# EAGLE board touch_pot_test (EAGLE 5.11)
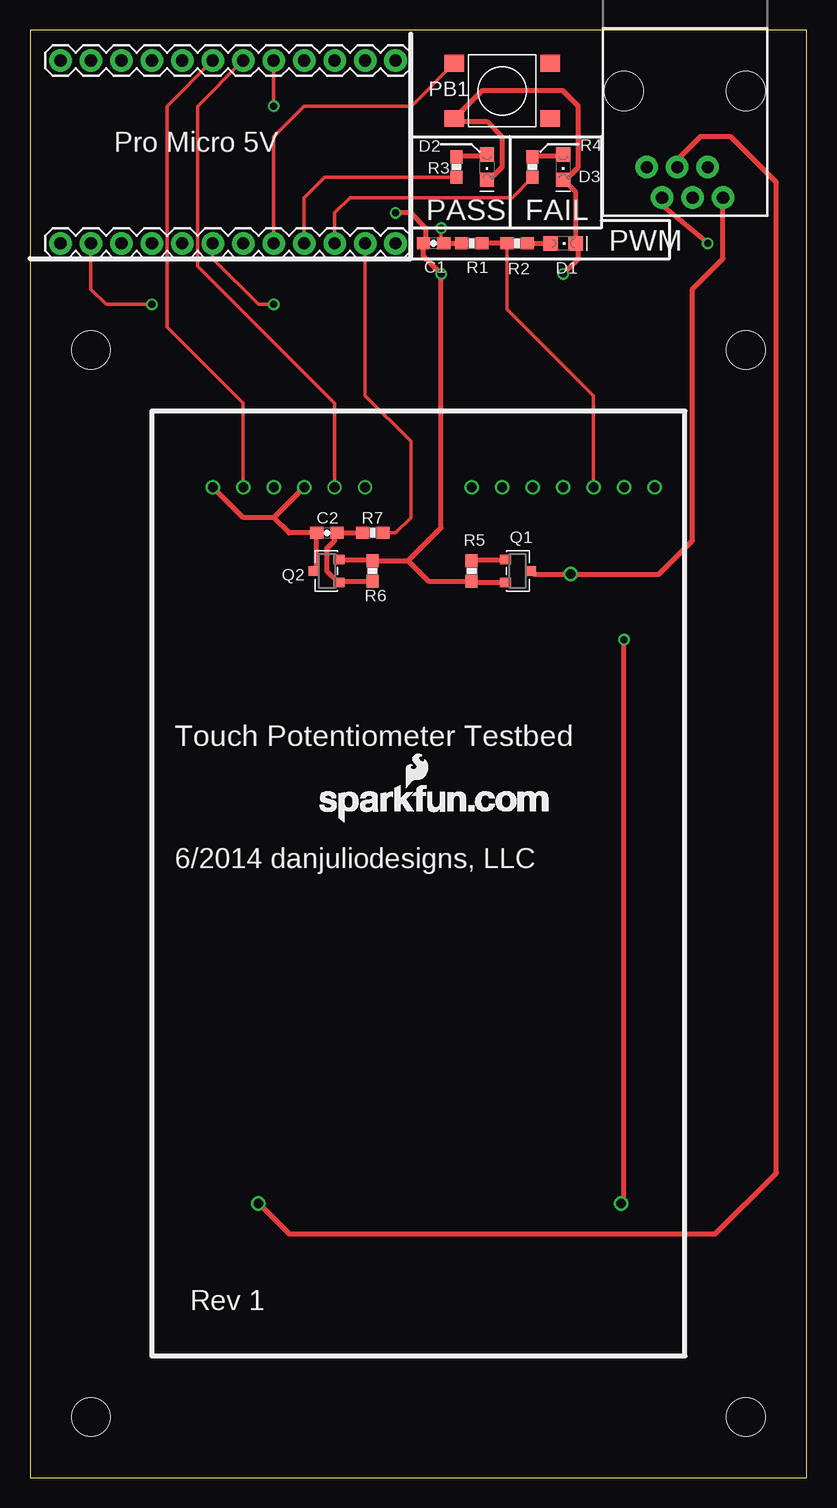
[diagram p0: board, top side]
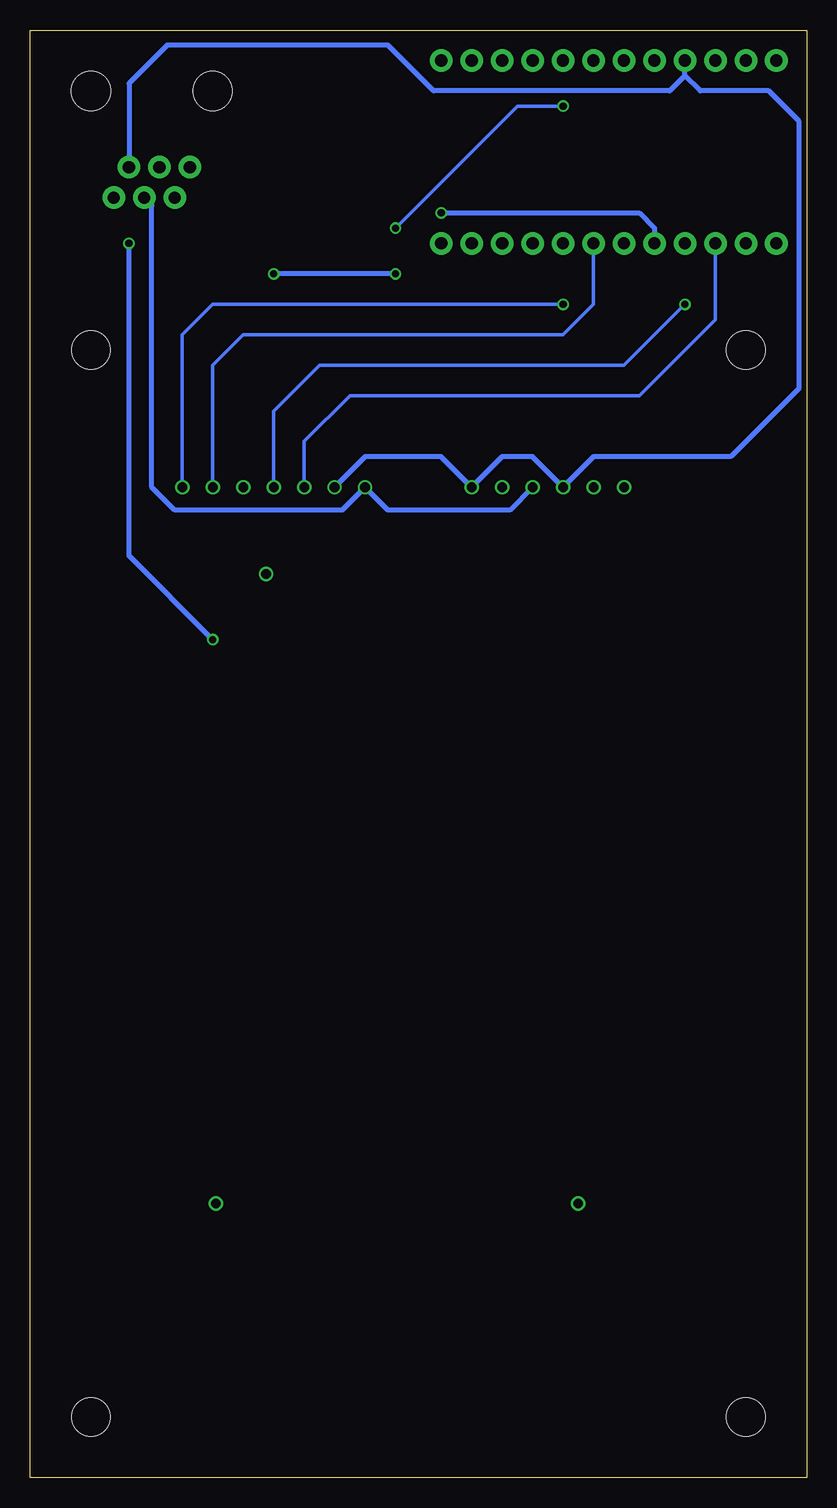
[diagram p1: board, bottom side, seen from below]

Size 64.77 x 120.65 mm. Coordinates in mm from the lower left corner, seen from the top.
Outline: 0,0 64.77,0 64.77,120.65 0,120.65 0,0
Copper layers (1*16): Top 0.0356mm / dielectric 1.5011mm / Bottom 0.0356mm
Design rules "LaenPCBOrder": minimum track width 6mil, minimum drill 13mil, track to track 6mil, track to pad 6mil, pad to pad 6mil, via to via 6mil, smd to smd 6mil, copper to edge 15mil, drill to drill 6mil, minimum pad ring 7mil, minimum via ring 7mil, stop-mask expansion 4mil, vias tented up to drill 0mil, thermal gap 10mil
Holes 3.2 mm at 5.08,5.08 59.69,5.08 5.08,93.98 59.69,93.98

## Footprints (pad centres in the part's own frame; a part is rotated, then mirrored left to right if it is on the bottom)
C0603 = smd 1.1 x 1: 1 -0.85,0; 2 0.85,0
MM0914_HOLE_PAD = drill 0.8 round: P$1 0,0
LED_0805 = smd 1.2 x 1.2: A 0,-1.05; C 0,1.05
RJ11-6 = drill 1.016 pad 1.88 round: 1 1.905,8.89; 2 3.175,6.35; 3 4.445,8.89; 4 5.715,6.35; 5 6.985,8.89; 6 8.255,6.35 | hole 3.251: 0,0; 10.16,0
1X12 = drill 1.016 pad 1.88 round: 1 0,0; 2 2.54,0; 3 5.08,0; 4 7.62,0; 5 10.16,0; 6 12.7,0; 7 15.24,0; 8 17.78,0; 9 20.32,0; 10 22.86,0; 11 25.4,0; 12 27.94,0
CK_PTS645_SMT = smd 1.6 x 1.4: 1 -4,2.3; 2 4,2.3; 3 -4,-2.3; 4 4,-2.3
SOT23-3 = smd 0.8 x 0.9: 1 -0.95,-1; 2 0.95,-1; 3 0,1.1
R0603 = smd 1.1 x 1: 1 -0.85,0; 2 0.85,0

## Placement (x,y rotation side)
C1  0.22uF  [C0603]  33.66,102.87 180 top
C2  0.1uF  [C0603]  24.77,78.74 0 top
CON1  SINGLE_PADTESTPIN  [MM0914_HOLE_PAD]  49.28,22.86 0 top
CON2  SINGLE_PADTESTPIN  [MM0914_HOLE_PAD]  19.05,22.86 0 top
CON3  SINGLE_PADTESTPIN  [MM0914_HOLE_PAD]  45.09,75.31 0 top
CON4  SINGLE_PADTESTPIN  [MM0914_HOLE_PAD]  52.07,82.55 0 top
CON5  SINGLE_PADTESTPIN  [MM0914_HOLE_PAD]  49.53,82.55 0 top
CON6  SINGLE_PADTESTPIN  [MM0914_HOLE_PAD]  46.99,82.55 0 top
CON7  SINGLE_PADTESTPIN  [MM0914_HOLE_PAD]  41.91,82.55 0 top
CON8  SINGLE_PADTESTPIN  [MM0914_HOLE_PAD]  44.45,82.55 0 top
CON9  SINGLE_PADTESTPIN  [MM0914_HOLE_PAD]  39.37,82.55 0 top
CON10  SINGLE_PADTESTPIN  [MM0914_HOLE_PAD]  36.83,82.55 0 top
CON11  SINGLE_PADTESTPIN  [MM0914_HOLE_PAD]  27.94,82.55 0 top
CON12  SINGLE_PADTESTPIN  [MM0914_HOLE_PAD]  25.4,82.55 0 top
CON13  SINGLE_PADTESTPIN  [MM0914_HOLE_PAD]  22.86,82.55 0 top
CON14  SINGLE_PADTESTPIN  [MM0914_HOLE_PAD]  20.32,82.55 0 top
CON15  SINGLE_PADTESTPIN  [MM0914_HOLE_PAD]  17.78,82.55 0 top
CON16  SINGLE_PADTESTPIN  [MM0914_HOLE_PAD]  15.24,82.55 0 top
D1  Yellow  [LED_0805]  44.45,102.87 270 top
D2  Green  [LED_0805]  38.1,109.22 180 top
D3  Red  [LED_0805]  44.45,109.22 180 top
J1  RJ11-6PTH  [RJ11-6]  59.69,115.57 180 top
JP1  LOGO-SFENEW  [SFE-NEW-WEBLOGO]  24.13,54.61 0 top
JP2  M12PTH  [1X12]  2.54,118.11 0 top
JP3  M12PTH  [1X12]  2.54,102.87 0 top
PB1  [CK_PTS645_SMT]  39.37,115.57 0 top
Q1  N-channel  [SOT23-3]  40.64,75.56 270 top
Q2  N-channel  [SOT23-3]  24.77,75.56 90 top
R1  100 kohm  [R0603]  36.83,102.87 180 top
R2  360 ohm  [R0603]  40.64,102.87 0 top
R3  360 ohm  [R0603]  35.56,109.22 90 top
R4  360 ohm  [R0603]  41.91,109.22 90 top
R5  100 kohm  [R0603]  36.83,75.56 270 top
R6  100 kohm  [R0603]  28.57,75.56 90 top
R7  1 kohm  [R0603]  28.57,78.74 180 top

## Library data of the parts
C1 C2 CON1-CON16 D1-D3 PB1 Q1 Q2 R1-R7 = djd_eagle_library
J1 JP1-JP3 = SparkFun

## Nets
EN: JP3.11 R7.1
FAIL: JP3.10 R4.1
GND: C1.2 D1.C D2.C D3.C JP3.5 PB1.3 Q1.2 Q2.2 R5.2 R6.2
N$2: C2.2 Q2.1 R6.1 R7.2
N$3: D1.A R2.2
N$17: D2.A R3.2
N$18: D3.A R4.2
PASS: JP3.9 R3.1
PGC: CON1.P$1 J1.5
PGD: CON2.P$1 J1.4
PWM: CON6.P$1 R1.1 R2.1
PWM_DC: C1.1 JP2.8 R1.2
RST: Q1.1 R5.1
RX: CON8.P$1 JP3.2
SCL: CON5.P$1 JP3.7
SDA: CON4.P$1 JP3.6
SW_GND: C2.1 CON10.P$1 CON13.P$1 CON16.P$1 J1.3 Q2.3
TRIG: JP3.8 PB1.1
TX: CON7.P$1 JP3.3
VCC: CON9.P$1 CON11.P$1 CON14.P$1 J1.2 JP2.4
VPP: CON3.P$1 J1.1 Q1.3
W1: CON12.P$1 JP2.7
W2: CON15.P$1 JP2.6

## Tracks (layer width: path | path; a pad name or v marks a point on that pad's centre or on a via)
EN
  Top 0.305: JP3.11 27.94,90.17 31.75,86.36 31.75,80.01 30.48,78.74 R7.1
FAIL
  Top 0.305: JP3.10 25.4,105.41 26.67,106.68 40.22,106.68 R4.1
GND  (via drill 0.6)
  Top 0.406: Q2.2 28.48,76.52 R6.2 31.54,76.42 | Q1.2 36.93,74.61 R5.2 33.23,74.72 31.54,76.42 | D2.C 38.32,108.17 39.37,109.22 39.37,111.76 38.1,113.03 35.61,113.03 PB1.3 37.67,115.57 44.45,115.57 45.72,114.3 45.72,109.22 44.67,108.17 D3.C 45.5,107.12 D1.C 45.72,102.65 45.72,101.6 v44.45,100.33 | v30.48,105.41 31.75,105.41 33.02,104.14 33.02,103.08 C1.2 32.8,101.81 v34.29,100.33 34.29,79.17 31.54,76.42
  Bottom 0.406: v34.29,100.33 v44.45,100.33 | JP3.5 12.7,104.14 13.97,105.41 v30.48,105.41
N$2
  Top 0.406: R6.1 25.86,74.72 Q2.1 25.71,74.61 24.77,75.56 24.77,77.47 25.4,78.11 25.4,78.53 C2.2 R7.2
N$3
  Top 0.406: R2.2 D1.A
N$17
  Top 0.406: D2.A 38,110.17 35.66,110.17 R3.2
N$18
  Top 0.406: D3.A 44.35,110.17 42.01,110.17 R4.2
PASS
  Top 0.305: JP3.9 22.86,106.68 24.55,108.37 R3.1
PGC  (via drill 0.6)
  Top 0.406: J1.5 52.7,106.05 v56.52,102.87 | v49.53,69.85 49.53,23.11 CON1.P$1
  Bottom 0.406: v56.52,102.87 56.52,76.83 v49.53,69.85
PGD
  Top 0.406: J1.4 53.98,109.86 55.88,111.76 58.42,111.76 62.23,107.95 62.23,25.4 57.15,20.32 21.59,20.32 CON2.P$1
PWM
  Top 0.305: CON6.P$1 46.99,90.17 39.79,97.37 R2.1
  Top 0.406: R2.1 R1.1
PWM_DC  (via drill 0.6)
  Top 0.305: v20.32,114.3 JP2.8 | v34.29,104.14 34.29,103.08 C1.1
  Top 0.406: C1.1 R1.2
  Bottom 0.305: v20.32,114.3 24.13,114.3 v34.29,104.14
RST
  Top 0.406: Q1.1 36.93,76.52 R5.1
RX  (via drill 0.6)
  Top 0.305: v10.16,97.79 6.35,97.79 5.08,99.06 JP3.2
  Bottom 0.305: CON8.P$1 44.45,88.9 40.64,92.71 15.24,92.71 v10.16,97.79
SCL
  Bottom 0.305: CON5.P$1 49.53,92.71 46.99,95.25 20.32,95.25 17.78,97.79 JP3.7
SDA  (via drill 0.6)
  Top 0.305: v20.32,97.79 19.05,97.79 15.24,101.6 JP3.6
  Bottom 0.305: CON4.P$1 52.07,95.25 49.53,97.79 v20.32,97.79
SW_GND
  Top 0.406: CON16.P$1 17.78,80.01 20.32,80.01 | 20.32,80.01 CON13.P$1 | 20.32,80.01 21.59,78.74 C2.1 23.91,75.81 Q2.3
  Bottom 0.406: CON13.P$1 24.77,80.64 34.92,80.64 CON10.P$1 38.73,80.64 52.7,80.64 54.61,82.55 54.61,106.05 J1.3
TRIG
  Top 0.305: JP3.8 20.32,111.76 22.86,114.3 31.8,114.3 PB1.1
TX
  Bottom 0.305: CON7.P$1 41.91,86.36 38.1,90.17 13.97,90.17 7.62,96.52 JP3.3
VCC
  Bottom 0.406: CON9.P$1 36.83,85.09 30.48,85.09 CON11.P$1 25.4,85.09 22.86,85.09 CON14.P$1 17.78,85.09 6.35,85.09 0.64,90.81 0.64,113.03 3.17,115.57 8.89,115.57 10.16,116.84 | 10.16,116.84 JP2.4 | 10.16,116.84 11.43,115.57 31.11,115.57 34.92,119.38 53.34,119.38 56.52,116.2 J1.2
VPP
  Top 0.406: J1.1 57.78,101.6 55.24,99.06 55.24,78.11 52.45,75.31 CON3.P$1 41.99,75.31 Q1.3
W1
  Top 0.305: CON12.P$1 25.4,89.53 13.97,100.97 13.97,114.3 JP2.7
W2
  Top 0.305: CON15.P$1 17.78,89.53 11.43,95.89 11.43,114.3 JP2.6

## Text on the board
tPlace: Pro Micro 5V | PASS | FAIL | PWM | Touch Potentiometer Testbed | 6/2014 danjuliodesigns, LLC | Rev 1